# EAGLE board gatormicrophone (EAGLE 9.0.1), part 1 of 2
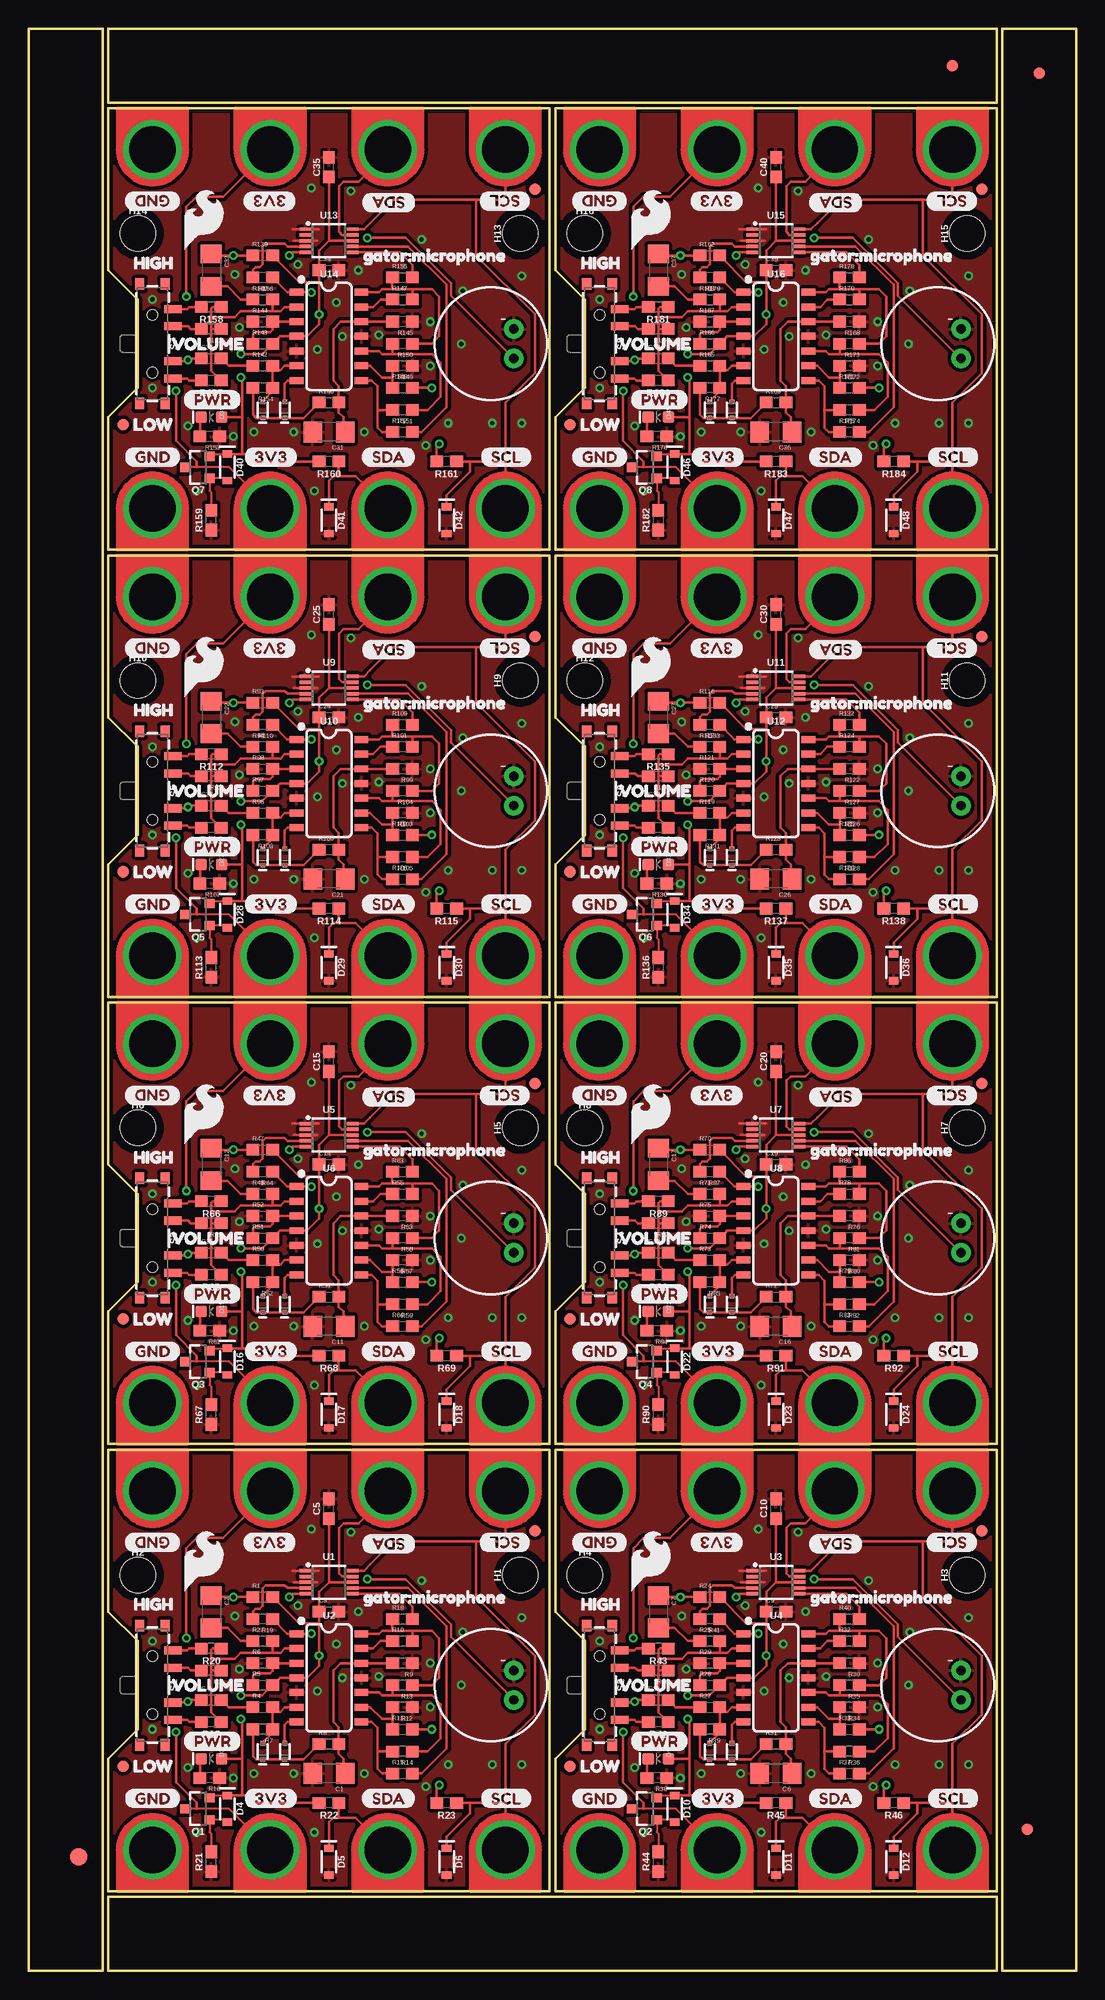
[diagram p0: board, top side]
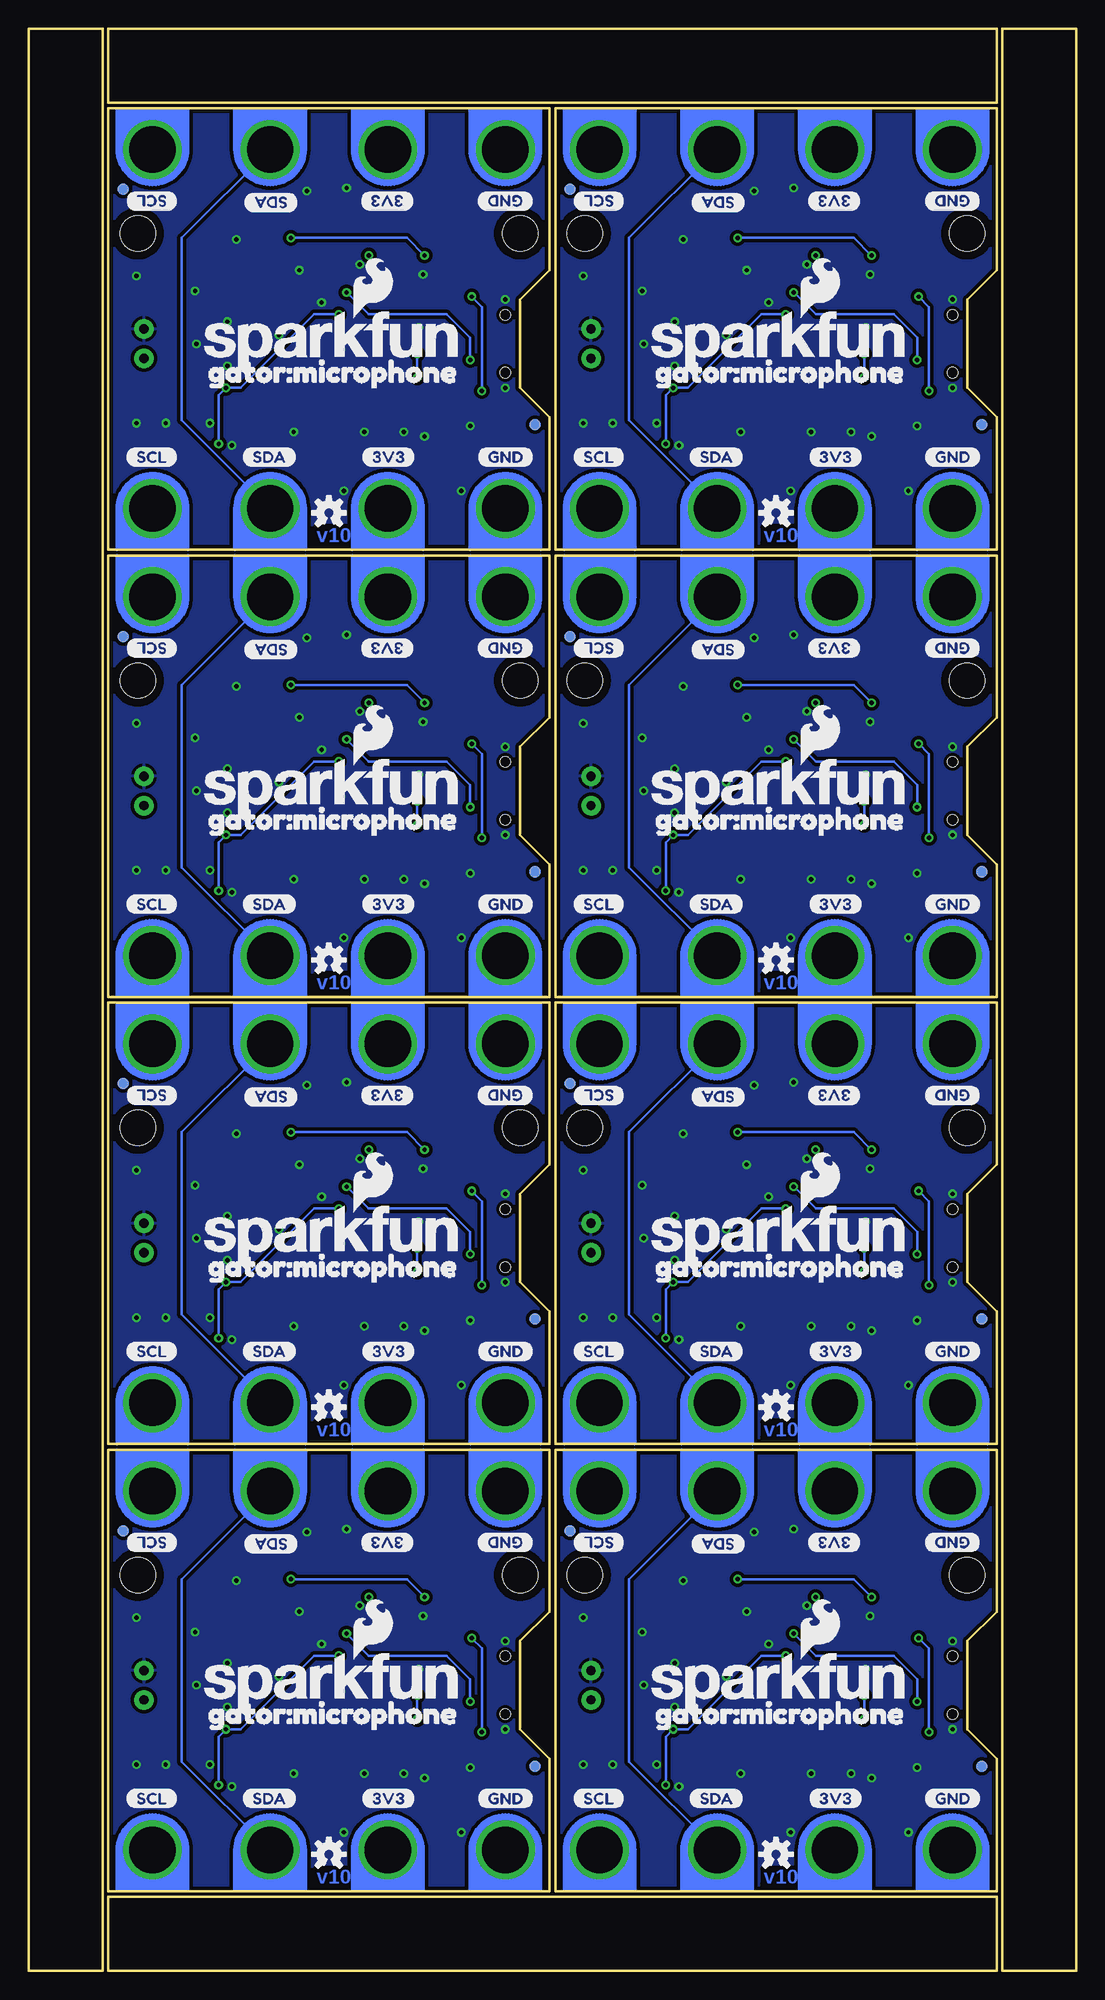
[diagram p1: board, bottom side, seen from below]

Size 90.42 x 167.64 mm. Coordinates in mm from the lower left corner, seen from the top.
Outline: 79.25,0 6.86,0 6.86,6.35 29.72,6.35
Outline: 27.18,6.35 83.57,6.35 83.57,0 76.71,0
Outline: 6.35,72.39 6.35,0 0,0 0,22.86
Outline: 0,20.32 0,167.64 6.35,167.64 6.35,69.85
Outline: 11.18,167.64 83.57,167.64 83.57,161.29 60.71,161.29
Outline: 63.25,161.29 6.86,161.29 6.86,167.64 13.72,167.64
Outline: 84.07,95.25 84.07,167.64 90.42,167.64 90.42,144.78
Outline: 90.42,147.32 90.42,0 84.07,0 84.07,97.79
Outline: 6.86,6.86 44.96,6.86 44.96,44.96 6.86,44.96 6.86,30.99 9.4,28.45 9.4,20.83 6.86,18.29 6.86,6.86
Outline: 45.47,6.86 83.57,6.86 83.57,44.96 45.47,44.96 45.47,30.99 48.01,28.45 48.01,20.83 45.47,18.29 45.47,6.86
Outline: 6.86,45.47 44.96,45.47 44.96,83.57 6.86,83.57 6.86,69.6 9.4,67.06 9.4,59.44 6.86,56.9 6.86,45.47
Outline: 45.47,45.47 83.57,45.47 83.57,83.57 45.47,83.57 45.47,69.6 48.01,67.06 48.01,59.44 45.47,56.9 45.47,45.47
Outline: 6.86,84.07 44.96,84.07 44.96,122.17 6.86,122.17 6.86,108.2 9.4,105.66 9.4,98.04 6.86,95.5 6.86,84.07
Outline: 45.47,84.07 83.57,84.07 83.57,122.17 45.47,122.17 45.47,108.2 48.01,105.66 48.01,98.04 45.47,95.5 45.47,84.07
Outline: 6.86,122.68 44.96,122.68 44.96,160.78 6.86,160.78 6.86,146.81 9.4,144.27 9.4,136.65 6.86,134.11 6.86,122.68
Outline: 45.47,122.68 83.57,122.68 83.57,160.78 45.47,160.78 45.47,146.81 48.01,144.27 48.01,136.65 45.47,134.11 45.47,122.68
Copper layers (1*16): Top 0.035mm / dielectric 1.5mm / Bottom 0.035mm
Design rules "SparkFun-2-layer-TIGHT": minimum track width 7mil, minimum drill 15mil, track to track 7mil, track to pad 7mil, pad to pad 7mil, via to via 7mil, smd to smd 7mil, copper to edge 7mil, drill to drill 7mil, minimum pad ring 7mil, minimum via ring 7mil, stop-mask expansion 4mil, vias tented up to drill 25mil, thermal gap 10mil

## Footprints (pad centres in the part's own frame; a part is rotated, then mirrored left to right if it is on the bottom)
1206@1 = smd 1.6 x 1.8: 1 -1.4,0; 2 1.4,0
0603 = smd 1.1 x 1: 1 -0.85,0; 2 0.85,0
SOD-523 = smd 0.4 x 0.4: A -0.7,0; C 0.7,0
LED-0603 = smd 1 x 1: A -0.877,0; C 0.877,0
SOD-323 = smd 0.63 x 0.83: A 1.15,0; C -1.15,0
FIDUCIAL-1.5X3 = smd 1.5 x 1.5: 1 0,0
FIDUCIAL-1X2 = smd 1 x 1: 1 0,0
STAND-OFF-TIGHT = hole 3.048: 0,0
GATOR_MINI = drill 4 pad 5.08: P$2 0,-0.254
MIC-9.7MM = drill 0.8 pad 1.676: 1 -2,1.27; 2 -2,-1.27
SOT23-3 = smd 0.8 x 0.9: 1 -0.95,-1; 2 0.95,-1; 3 0,1.1
SWITCH_SP3T_SMD = smd 0.7 x 1.5: 1 3,-1.75; 2 1.5,-1.75; 3 -1.5,-1.75; 4 -3,-1.75 | smd 1 x 0.8: P$1 -5.15,-1.1; P$2 -5.15,1.1; P$3 5.15,1.1; P$4 5.15,-1.1 | hole 0.9: 2.5,0; -2.5,0
PAD.03X.03 = smd 0.762 x 0.762: P$1 0,0
MSOP10 = smd 0.3 x 1: 1 -1,-2.05; 2 -0.5,-2.05; 3 0,-2.05; 4 0.5,-2.05; 5 1,-2.05; 6 1,2.05; 7 0.5,2.05; 8 0,2.05; 9 -0.5,2.05; 10 -1,2.05
SO14 = smd 0.6 x 1.2: 1 -3.175,-2.8; 2 -1.905,-2.8; 3 -0.635,-2.8; 4 0.635,-2.8; 5 1.905,-2.8; 6 3.175,-2.8; 7 4.445,-2.8; 8 4.445,2.8; 9 3.175,2.8; 10 1.905,2.8; 11 0.635,2.8; 12 -0.635,2.8; 13 -1.905,2.8; 14 -3.175,2.8

## Placement (x,y rotation side)
C1  10uF  [1206@1]  25.91,17.02 180 top
C2  10uF  [1206@1]  15.75,30.99 270 top
C3  1.0uF  [0603]  25.91,30.99 0 top
C4  1.0uF  [0603]  15.75,23.37 0 top
C5  0.1uF  [0603]  25.91,39.88 90 top
C6  10uF  [1206@1]  64.52,17.02 180 top
C7  10uF  [1206@1]  54.36,30.99 270 top
C8  1.0uF  [0603]  54.36,23.37 0 top
C9  1.0uF  [0603]  64.52,30.99 0 top
C10  0.1uF  [0603]  64.52,39.88 90 top
C11  10uF  [1206@1]  25.91,55.63 180 top
C12  10uF  [1206@1]  15.75,69.6 270 top
C13  1.0uF  [0603]  15.75,61.98 0 top
C14  1.0uF  [0603]  25.91,69.6 0 top
C15  0.1uF  [0603]  25.91,78.49 90 top
C16  10uF  [1206@1]  64.52,55.63 180 top
C17  10uF  [1206@1]  54.36,69.6 270 top
C18  1.0uF  [0603]  54.36,61.98 0 top
C19  1.0uF  [0603]  64.52,69.6 0 top
C20  0.1uF  [0603]  64.52,78.49 90 top
C21  10uF  [1206@1]  25.91,94.23 180 top
C22  10uF  [1206@1]  15.75,108.2 270 top
C23  1.0uF  [0603]  15.75,100.58 0 top
C24  1.0uF  [0603]  25.91,108.2 0 top
C25  0.1uF  [0603]  25.91,117.09 90 top
C26  10uF  [1206@1]  64.52,94.23 180 top
C27  10uF  [1206@1]  54.36,108.2 270 top
C28  1.0uF  [0603]  54.36,100.58 0 top
C29  1.0uF  [0603]  64.52,108.2 0 top
C30  0.1uF  [0603]  64.52,117.09 90 top
C31  10uF  [1206@1]  25.91,132.84 180 top
C32  10uF  [1206@1]  15.75,146.81 270 top
C33  1.0uF  [0603]  15.75,139.19 0 top
C34  1.0uF  [0603]  25.91,146.81 0 top
C35  0.1uF  [0603]  25.91,155.7 90 top
C36  10uF  [1206@1]  64.52,132.84 180 top
C37  10uF  [1206@1]  54.36,146.81 270 top
C38  1.0uF  [0603]  54.36,139.19 0 top
C39  1.0uF  [0603]  64.52,146.81 0 top
C40  0.1uF  [0603]  64.52,155.7 90 top
D1  120mA/40V/370mV  [SOD-523]  20.19,18.92 270 top
D2  120mA/40V/370mV  [SOD-523]  22.1,18.92 270 top
D3  RED  [LED-0603]  15.75,18.29 180 top
D4  3.6V  [SOD-323]  17.14,13.97 270 top
D5  3.6V  [SOD-323]  25.91,9.4 270 top
D6  3.6V  [SOD-323]  36.07,9.4 270 top
D7  120mA/40V/370mV  [SOD-523]  58.8,18.92 270 top
D8  120mA/40V/370mV  [SOD-523]  60.71,18.92 270 top
D9  RED  [LED-0603]  54.36,18.29 180 top
D10  3.6V  [SOD-323]  55.75,13.97 270 top
D11  3.6V  [SOD-323]  64.52,9.4 270 top
D12  3.6V  [SOD-323]  74.68,9.4 270 top
D13  120mA/40V/370mV  [SOD-523]  20.19,57.53 270 top
D14  120mA/40V/370mV  [SOD-523]  22.1,57.53 270 top
D15  RED  [LED-0603]  15.75,56.9 180 top
D16  3.6V  [SOD-323]  17.14,52.58 270 top
D17  3.6V  [SOD-323]  25.91,48.01 270 top
D18  3.6V  [SOD-323]  36.07,48.01 270 top
D19  120mA/40V/370mV  [SOD-523]  58.8,57.53 270 top
D20  120mA/40V/370mV  [SOD-523]  60.71,57.53 270 top
D21  RED  [LED-0603]  54.36,56.9 180 top
D22  3.6V  [SOD-323]  55.75,52.58 270 top
D23  3.6V  [SOD-323]  64.52,48.01 270 top
D24  3.6V  [SOD-323]  74.68,48.01 270 top
D25  120mA/40V/370mV  [SOD-523]  20.19,96.14 270 top
D26  120mA/40V/370mV  [SOD-523]  22.1,96.14 270 top
D27  RED  [LED-0603]  15.75,95.5 180 top
D28  3.6V  [SOD-323]  17.14,91.19 270 top
D29  3.6V  [SOD-323]  25.91,86.61 270 top
D30  3.6V  [SOD-323]  36.07,86.61 270 top
D31  120mA/40V/370mV  [SOD-523]  58.8,96.14 270 top
D32  120mA/40V/370mV  [SOD-523]  60.71,96.14 270 top
D33  RED  [LED-0603]  54.36,95.5 180 top
D34  3.6V  [SOD-323]  55.75,91.19 270 top
D35  3.6V  [SOD-323]  64.52,86.61 270 top
D36  3.6V  [SOD-323]  74.68,86.61 270 top
D37  120mA/40V/370mV  [SOD-523]  20.19,134.75 270 top
D38  120mA/40V/370mV  [SOD-523]  22.1,134.75 270 top
D39  RED  [LED-0603]  15.75,134.11 180 top
D40  3.6V  [SOD-323]  17.14,129.79 270 top
D41  3.6V  [SOD-323]  25.91,125.22 270 top
D42  3.6V  [SOD-323]  36.07,125.22 270 top
D43  120mA/40V/370mV  [SOD-523]  58.8,134.75 270 top
D44  120mA/40V/370mV  [SOD-523]  60.71,134.75 270 top
D45  RED  [LED-0603]  54.36,134.11 180 top
D46  3.6V  [SOD-323]  55.75,129.79 270 top
D47  3.6V  [SOD-323]  64.52,125.22 270 top
D48  3.6V  [SOD-323]  74.68,125.22 270 top
E$3  [FIDUCIAL-1.5X3]  4.32,9.84 0 top
E$5  [FIDUCIAL-1X2]  79.76,164.47 90 top
E$7  [FIDUCIAL-1X2]  87.25,163.83 180 top
E$8  [FIDUCIAL-1X2]  86.23,12.19 0 top
FID1  FIDUCIAL1X2  [FIDUCIAL-1X2]  8.13,17.65 0 bottom
FID2  FIDUCIAL1X2  [FIDUCIAL-1X2]  43.69,37.97 0 bottom
FID3  FIDUCIAL1X2  [FIDUCIAL-1X2]  8.13,17.65 0 top
FID4  FIDUCIAL1X2  [FIDUCIAL-1X2]  43.69,37.97 0 top
FID5  FIDUCIAL1X2  [FIDUCIAL-1X2]  46.74,17.65 0 top
FID6  FIDUCIAL1X2  [FIDUCIAL-1X2]  82.3,37.97 0 top
FID7  FIDUCIAL1X2  [FIDUCIAL-1X2]  46.74,17.65 0 bottom
FID8  FIDUCIAL1X2  [FIDUCIAL-1X2]  82.3,37.97 0 bottom
FID9  FIDUCIAL1X2  [FIDUCIAL-1X2]  8.13,56.26 0 top
FID10  FIDUCIAL1X2  [FIDUCIAL-1X2]  43.69,76.58 0 top
FID11  FIDUCIAL1X2  [FIDUCIAL-1X2]  8.13,56.26 0 bottom
FID12  FIDUCIAL1X2  [FIDUCIAL-1X2]  43.69,76.58 0 bottom
FID13  FIDUCIAL1X2  [FIDUCIAL-1X2]  46.74,56.26 0 top
FID14  FIDUCIAL1X2  [FIDUCIAL-1X2]  82.3,76.58 0 top
FID15  FIDUCIAL1X2  [FIDUCIAL-1X2]  46.74,56.26 0 bottom
FID16  FIDUCIAL1X2  [FIDUCIAL-1X2]  82.3,76.58 0 bottom
FID17  FIDUCIAL1X2  [FIDUCIAL-1X2]  8.13,94.87 0 top
FID18  FIDUCIAL1X2  [FIDUCIAL-1X2]  43.69,115.19 0 top
FID19  FIDUCIAL1X2  [FIDUCIAL-1X2]  8.13,94.87 0 bottom
FID20  FIDUCIAL1X2  [FIDUCIAL-1X2]  43.69,115.19 0 bottom
FID21  FIDUCIAL1X2  [FIDUCIAL-1X2]  46.74,94.87 0 top
FID22  FIDUCIAL1X2  [FIDUCIAL-1X2]  82.3,115.19 0 top
FID23  FIDUCIAL1X2  [FIDUCIAL-1X2]  46.74,94.87 0 bottom
FID24  FIDUCIAL1X2  [FIDUCIAL-1X2]  82.3,115.19 0 bottom
FID25  FIDUCIAL1X2  [FIDUCIAL-1X2]  8.13,133.48 0 top
FID26  FIDUCIAL1X2  [FIDUCIAL-1X2]  43.69,153.8 0 top
FID27  FIDUCIAL1X2  [FIDUCIAL-1X2]  8.13,133.48 0 bottom
FID28  FIDUCIAL1X2  [FIDUCIAL-1X2]  43.69,153.8 0 bottom
FID29  FIDUCIAL1X2  [FIDUCIAL-1X2]  46.74,133.48 0 top
FID30  FIDUCIAL1X2  [FIDUCIAL-1X2]  82.3,153.8 0 top
FID31  FIDUCIAL1X2  [FIDUCIAL-1X2]  46.74,133.48 0 bottom
FID32  FIDUCIAL1X2  [FIDUCIAL-1X2]  82.3,153.8 0 bottom
FRAME1  FRAME-LETTER  [CREATIVE_COMMONS]  8.13,-3.3 0 top  (outside the outline)
FRAME2  FRAME-LETTER  [CREATIVE_COMMONS]  46.74,-3.3 0 top  (outside the outline)
H1  STAND-OFFTIGHT  [STAND-OFF-TIGHT]  42.42,34.16 90 top
H2  STAND-OFFTIGHT  [STAND-OFF-TIGHT]  9.4,34.16 0 top
H3  STAND-OFFTIGHT  [STAND-OFF-TIGHT]  81.03,34.16 90 top
H4  STAND-OFFTIGHT  [STAND-OFF-TIGHT]  48.01,34.16 0 top
H5  STAND-OFFTIGHT  [STAND-OFF-TIGHT]  42.42,72.77 90 top
H6  STAND-OFFTIGHT  [STAND-OFF-TIGHT]  9.4,72.77 0 top
H7  STAND-OFFTIGHT  [STAND-OFF-TIGHT]  81.03,72.77 90 top
H8  STAND-OFFTIGHT  [STAND-OFF-TIGHT]  48.01,72.77 0 top
H9  STAND-OFFTIGHT  [STAND-OFF-TIGHT]  42.42,111.38 90 top
H10  STAND-OFFTIGHT  [STAND-OFF-TIGHT]  9.4,111.38 0 top
H11  STAND-OFFTIGHT  [STAND-OFF-TIGHT]  81.03,111.38 90 top
H12  STAND-OFFTIGHT  [STAND-OFF-TIGHT]  48.01,111.38 0 top
H13  STAND-OFFTIGHT  [STAND-OFF-TIGHT]  42.42,149.99 90 top
H14  STAND-OFFTIGHT  [STAND-OFF-TIGHT]  9.4,149.99 0 top
H15  STAND-OFFTIGHT  [STAND-OFF-TIGHT]  81.03,149.99 90 top
H16  STAND-OFFTIGHT  [STAND-OFF-TIGHT]  48.01,149.99 0 top
J1  GATORGATOR_MINI  [GATOR_MINI]  10.67,41.15 180 top
J2  GATORGATOR_MINI  [GATOR_MINI]  41.15,10.67 0 top
J3  GATORGATOR_MINI  [GATOR_MINI]  30.99,10.67 0 top
J4  GATORGATOR_MINI  [GATOR_MINI]  20.83,10.67 0 top
J5  GATORGATOR_MINI  [GATOR_MINI]  10.67,10.67 0 top
J6  GATORGATOR_MINI  [GATOR_MINI]  30.99,41.15 180 top
J7  GATORGATOR_MINI  [GATOR_MINI]  41.15,41.15 180 top
J8  GATORGATOR_MINI  [GATOR_MINI]  20.83,41.15 180 top
J9  GATORGATOR_MINI  [GATOR_MINI]  79.76,10.67 0 top
J10  GATORGATOR_MINI  [GATOR_MINI]  69.6,10.67 0 top
J11  GATORGATOR_MINI  [GATOR_MINI]  59.44,10.67 0 top
J12  GATORGATOR_MINI  [GATOR_MINI]  49.28,10.67 0 top
J13  GATORGATOR_MINI  [GATOR_MINI]  49.28,41.15 180 top
J14  GATORGATOR_MINI  [GATOR_MINI]  69.6,41.15 180 top
J15  GATORGATOR_MINI  [GATOR_MINI]  79.76,41.15 180 top
J16  GATORGATOR_MINI  [GATOR_MINI]  59.44,41.15 180 top
J17  GATORGATOR_MINI  [GATOR_MINI]  41.15,49.28 0 top
J18  GATORGATOR_MINI  [GATOR_MINI]  30.99,49.28 0 top
J19  GATORGATOR_MINI  [GATOR_MINI]  20.83,49.28 0 top
J20  GATORGATOR_MINI  [GATOR_MINI]  10.67,49.28 0 top
J21  GATORGATOR_MINI  [GATOR_MINI]  10.67,79.76 180 top
J22  GATORGATOR_MINI  [GATOR_MINI]  30.99,79.76 180 top
J23  GATORGATOR_MINI  [GATOR_MINI]  41.15,79.76 180 top
J24  GATORGATOR_MINI  [GATOR_MINI]  20.83,79.76 180 top
J25  GATORGATOR_MINI  [GATOR_MINI]  79.76,49.28 0 top
J26  GATORGATOR_MINI  [GATOR_MINI]  69.6,49.28 0 top
J27  GATORGATOR_MINI  [GATOR_MINI]  59.44,49.28 0 top
J28  GATORGATOR_MINI  [GATOR_MINI]  49.28,49.28 0 top
J29  GATORGATOR_MINI  [GATOR_MINI]  49.28,79.76 180 top
J30  GATORGATOR_MINI  [GATOR_MINI]  69.6,79.76 180 top
J31  GATORGATOR_MINI  [GATOR_MINI]  79.76,79.76 180 top
J32  GATORGATOR_MINI  [GATOR_MINI]  59.44,79.76 180 top
J33  GATORGATOR_MINI  [GATOR_MINI]  41.15,87.88 0 top
J34  GATORGATOR_MINI  [GATOR_MINI]  30.99,87.88 0 top
J35  GATORGATOR_MINI  [GATOR_MINI]  20.83,87.88 0 top
J36  GATORGATOR_MINI  [GATOR_MINI]  10.67,87.88 0 top
J37  GATORGATOR_MINI  [GATOR_MINI]  10.67,118.36 180 top
J38  GATORGATOR_MINI  [GATOR_MINI]  30.99,118.36 180 top
J39  GATORGATOR_MINI  [GATOR_MINI]  41.15,118.36 180 top
J40  GATORGATOR_MINI  [GATOR_MINI]  20.83,118.36 180 top
J41  GATORGATOR_MINI  [GATOR_MINI]  79.76,87.88 0 top
J42  GATORGATOR_MINI  [GATOR_MINI]  69.6,87.88 0 top
J43  GATORGATOR_MINI  [GATOR_MINI]  59.44,87.88 0 top
J44  GATORGATOR_MINI  [GATOR_MINI]  49.28,87.88 0 top
J45  GATORGATOR_MINI  [GATOR_MINI]  49.28,118.36 180 top
J46  GATORGATOR_MINI  [GATOR_MINI]  69.6,118.36 180 top
J47  GATORGATOR_MINI  [GATOR_MINI]  79.76,118.36 180 top
J48  GATORGATOR_MINI  [GATOR_MINI]  59.44,118.36 180 top
J49  GATORGATOR_MINI  [GATOR_MINI]  41.15,126.49 0 top
J50  GATORGATOR_MINI  [GATOR_MINI]  30.99,126.49 0 top
J51  GATORGATOR_MINI  [GATOR_MINI]  20.83,126.49 0 top
J52  GATORGATOR_MINI  [GATOR_MINI]  10.67,126.49 0 top
J53  GATORGATOR_MINI  [GATOR_MINI]  10.67,156.97 180 top
J54  GATORGATOR_MINI  [GATOR_MINI]  30.99,156.97 180 top
J55  GATORGATOR_MINI  [GATOR_MINI]  41.15,156.97 180 top
J56  GATORGATOR_MINI  [GATOR_MINI]  20.83,156.97 180 top
J57  GATORGATOR_MINI  [GATOR_MINI]  79.76,126.49 0 top
J58  GATORGATOR_MINI  [GATOR_MINI]  69.6,126.49 0 top
J59  GATORGATOR_MINI  [GATOR_MINI]  59.44,126.49 0 top
J60  GATORGATOR_MINI  [GATOR_MINI]  49.28,126.49 0 top
J61  GATORGATOR_MINI  [GATOR_MINI]  49.28,156.97 180 top
J62  GATORGATOR_MINI  [GATOR_MINI]  69.6,156.97 180 top
J63  GATORGATOR_MINI  [GATOR_MINI]  79.76,156.97 180 top
J64  GATORGATOR_MINI  [GATOR_MINI]  59.44,156.97 180 top
LOGO1  OSHW-LOGOS  [OSHW-LOGO-S]  25.91,10.03 0 bottom
LOGO2  SFE_LOGO_NAME_FLAME.2_INCH  [SFE_LOGO_NAME_FLAME_.2]  25.65,24.64 0 bottom
LOGO3  SFE_LOGO_FLAME.2_INCH  [SFE_LOGO_FLAME_.2]  15.11,35.31 0 top
LOGO4  OSHW-LOGOS  [OSHW-LOGO-S]  64.52,10.03 0 bottom
LOGO5  SFE_LOGO_NAME_FLAME.2_INCH  [SFE_LOGO_NAME_FLAME_.2]  64.26,24.64 0 bottom
LOGO6  SFE_LOGO_FLAME.2_INCH  [SFE_LOGO_FLAME_.2]  53.72,35.31 0 top
LOGO7  OSHW-LOGOS  [OSHW-LOGO-S]  25.91,48.64 0 bottom
LOGO8  SFE_LOGO_NAME_FLAME.2_INCH  [SFE_LOGO_NAME_FLAME_.2]  25.65,63.25 0 bottom
LOGO9  SFE_LOGO_FLAME.2_INCH  [SFE_LOGO_FLAME_.2]  15.11,73.91 0 top
LOGO10  OSHW-LOGOS  [OSHW-LOGO-S]  64.52,48.64 0 bottom
LOGO11  SFE_LOGO_NAME_FLAME.2_INCH  [SFE_LOGO_NAME_FLAME_.2]  64.26,63.25 0 bottom
LOGO12  SFE_LOGO_FLAME.2_INCH  [SFE_LOGO_FLAME_.2]  53.72,73.91 0 top
LOGO13  OSHW-LOGOS  [OSHW-LOGO-S]  25.91,87.25 0 bottom
LOGO14  SFE_LOGO_NAME_FLAME.2_INCH  [SFE_LOGO_NAME_FLAME_.2]  25.65,101.85 0 bottom
LOGO15  SFE_LOGO_FLAME.2_INCH  [SFE_LOGO_FLAME_.2]  15.11,112.52 0 top
LOGO16  OSHW-LOGOS  [OSHW-LOGO-S]  64.52,87.25 0 bottom
LOGO17  SFE_LOGO_NAME_FLAME.2_INCH  [SFE_LOGO_NAME_FLAME_.2]  64.26,101.85 0 bottom
LOGO18  SFE_LOGO_FLAME.2_INCH  [SFE_LOGO_FLAME_.2]  53.72,112.52 0 top
LOGO19  OSHW-LOGOS  [OSHW-LOGO-S]  25.91,125.86 0 bottom
LOGO20  SFE_LOGO_NAME_FLAME.2_INCH  [SFE_LOGO_NAME_FLAME_.2]  25.65,140.46 0 bottom
LOGO21  SFE_LOGO_FLAME.2_INCH  [SFE_LOGO_FLAME_.2]  15.11,151.13 0 top
LOGO22  OSHW-LOGOS  [OSHW-LOGO-S]  64.52,125.86 0 bottom
LOGO23  SFE_LOGO_NAME_FLAME.2_INCH  [SFE_LOGO_NAME_FLAME_.2]  64.26,140.46 0 bottom
LOGO24  SFE_LOGO_FLAME.2_INCH  [SFE_LOGO_FLAME_.2]  53.72,151.13 0 top
MIC1  MIC9.7MM  [MIC-9.7MM]  39.88,24.64 180 top
MIC2  MIC9.7MM  [MIC-9.7MM]  78.49,24.64 180 top
MIC3  MIC9.7MM  [MIC-9.7MM]  39.88,63.25 180 top
MIC4  MIC9.7MM  [MIC-9.7MM]  78.49,63.25 180 top
MIC5  MIC9.7MM  [MIC-9.7MM]  39.88,101.85 180 top
MIC6  MIC9.7MM  [MIC-9.7MM]  78.49,101.85 180 top
MIC7  MIC9.7MM  [MIC-9.7MM]  39.88,140.46 180 top
MIC8  MIC9.7MM  [MIC-9.7MM]  78.49,140.46 180 top
Q1  2.5A/30V/105mΩ  [SOT23-3]  14.61,13.97 90 top
Q2  2.5A/30V/105mΩ  [SOT23-3]  53.21,13.97 90 top
Q3  2.5A/30V/105mΩ  [SOT23-3]  14.61,52.58 90 top
Q4  2.5A/30V/105mΩ  [SOT23-3]  53.21,52.58 90 top
Q5  2.5A/30V/105mΩ  [SOT23-3]  14.61,91.19 90 top
Q6  2.5A/30V/105mΩ  [SOT23-3]  53.21,91.19 90 top
Q7  2.5A/30V/105mΩ  [SOT23-3]  14.61,129.79 90 top
Q8  2.5A/30V/105mΩ  [SOT23-3]  53.21,129.79 90 top
R1  2.2k  [0603]  20.19,32.26 0 top
R2  1k  [0603]  20.19,28.45 0 top
R3  100k  [0603]  15.75,25.91 180 top
R4  10k  [0603]  20.19,22.73 0 top
R5  10k  [0603]  20.19,24.64 0 top
R6  10k  [0603]  20.19,26.54 0 top
R7  22k  [0603]  20.19,20.83 180 top
R8  100  [0603]  25.91,19.56 0 top
R9  10k  [0603]  32.26,26.54 180 top
R10  1k  [0603]  32.26,28.45 0 top
R11  100k  [0603]  32.26,20.83 0 top
R12  3.3k  [0603]  32.26,22.73 180 top
R13  1k  [0603]  32.26,24.64 180 top
R14  100k  [0603]  32.26,18.92 180 top
R15  100  [0603]  32.26,17.02 0 top
R16  1k  [0603]  15.62,16.64 180 top
R17  10k  [0603]  15.75,21.46 180 top
R18  100  [0603]  32.26,30.35 0 top
R19  100  [0603]  20.19,30.35 180 top
R20  1M  [0603]  15.75,27.81 180 top
R21  10k  [0603]  15.75,9.4 90 top
R22  10k  [0603]  25.91,14.48 180 top
R23  10k  [0603]  36.07,14.48 180 top
R24  2.2k  [0603]  58.8,32.26 0 top
R25  1k  [0603]  58.8,28.45 0 top
R26  100k  [0603]  54.36,25.91 180 top
R27  10k  [0603]  58.8,22.73 0 top
R28  10k  [0603]  58.8,24.64 0 top
R29  10k  [0603]  58.8,26.54 0 top
R30  10k  [0603]  70.87,26.54 180 top
R31  100  [0603]  64.52,19.56 0 top
R32  1k  [0603]  70.87,28.45 0 top
R33  100k  [0603]  70.87,20.83 0 top
R34  3.3k  [0603]  70.87,22.73 180 top
R35  1k  [0603]  70.87,24.64 180 top
R36  100k  [0603]  70.87,18.92 180 top
R37  100  [0603]  70.87,17.02 0 top
R38  1k  [0603]  54.23,16.64 180 top
R39  22k  [0603]  58.8,20.83 180 top
R40  100  [0603]  70.87,30.35 0 top
R41  100  [0603]  58.8,30.35 180 top
R42  10k  [0603]  54.36,21.46 180 top
R43  1M  [0603]  54.36,27.81 180 top
R44  10k  [0603]  54.36,9.4 90 top
R45  10k  [0603]  64.52,14.48 180 top
R46  10k  [0603]  74.68,14.48 180 top
R47  2.2k  [0603]  20.19,70.87 0 top
R48  1k  [0603]  20.19,67.06 0 top
R49  100k  [0603]  15.75,64.52 180 top
R50  10k  [0603]  20.19,61.34 0 top
R51  10k  [0603]  20.19,63.25 0 top
R52  10k  [0603]  20.19,65.15 0 top
R53  10k  [0603]  32.26,65.15 180 top
R54  100  [0603]  25.91,58.17 0 top
R55  1k  [0603]  32.26,67.06 0 top
R56  100k  [0603]  32.26,59.44 0 top
R57  3.3k  [0603]  32.26,61.34 180 top
R58  1k  [0603]  32.26,63.25 180 top
R59  100k  [0603]  32.26,57.53 180 top
R60  100  [0603]  32.26,55.63 0 top
R61  1k  [0603]  15.62,55.24 180 top
R62  22k  [0603]  20.19,59.44 180 top
R63  100  [0603]  32.26,68.96 0 top
R64  100  [0603]  20.19,68.96 180 top
R65  10k  [0603]  15.75,60.07 180 top
R66  1M  [0603]  15.75,66.42 180 top
R67  10k  [0603]  15.75,48.01 90 top
R68  10k  [0603]  25.91,53.09 180 top
R69  10k  [0603]  36.07,53.09 180 top
R70  2.2k  [0603]  58.8,70.87 0 top
R71  1k  [0603]  58.8,67.06 0 top
R72  100k  [0603]  54.36,64.52 180 top
R73  10k  [0603]  58.8,61.34 0 top
R74  10k  [0603]  58.8,63.25 0 top
R75  10k  [0603]  58.8,65.15 0 top
R76  10k  [0603]  70.87,65.15 180 top
R77  100  [0603]  64.52,58.17 0 top
R78  1k  [0603]  70.87,67.06 0 top
R79  100k  [0603]  70.87,59.44 0 top
R80  3.3k  [0603]  70.87,61.34 180 top
R81  1k  [0603]  70.87,63.25 180 top
R82  100k  [0603]  70.87,57.53 180 top
R83  100  [0603]  70.87,55.63 0 top
R84  1k  [0603]  54.23,55.24 180 top
R85  22k  [0603]  58.8,59.44 180 top
R86  100  [0603]  70.87,68.96 0 top
R87  100  [0603]  58.8,68.96 180 top
R88  10k  [0603]  54.36,60.07 180 top
R89  1M  [0603]  54.36,66.42 180 top
R90  10k  [0603]  54.36,48.01 90 top
R91  10k  [0603]  64.52,53.09 180 top
R92  10k  [0603]  74.68,53.09 180 top
R93  2.2k  [0603]  20.19,109.47 0 top
R94  1k  [0603]  20.19,105.66 0 top
R95  100k  [0603]  15.75,103.12 180 top
R96  10k  [0603]  20.19,99.95 0 top
R97  10k  [0603]  20.19,101.85 0 top
R98  10k  [0603]  20.19,103.76 0 top
R99  10k  [0603]  32.26,103.76 180 top
R100  100  [0603]  25.91,96.77 0 top
R101  1k  [0603]  32.26,105.66 0 top
R102  100k  [0603]  32.26,98.04 0 top
R103  3.3k  [0603]  32.26,99.95 180 top
R104  1k  [0603]  32.26,101.85 180 top
R105  100k  [0603]  32.26,96.14 180 top
R106  100  [0603]  32.26,94.23 0 top
R107  1k  [0603]  15.62,93.85 180 top
R108  22k  [0603]  20.19,98.04 180 top
R109  100  [0603]  32.26,107.57 0 top
R110  100  [0603]  20.19,107.57 180 top
R111  10k  [0603]  15.75,98.68 180 top
R112  1M  [0603]  15.75,105.03 180 top
R113  10k  [0603]  15.75,86.61 90 top
R114  10k  [0603]  25.91,91.69 180 top
R115  10k  [0603]  36.07,91.69 180 top
R116  2.2k  [0603]  58.8,109.47 0 top
R117  1k  [0603]  58.8,105.66 0 top
R118  100k  [0603]  54.36,103.12 180 top
R119  10k  [0603]  58.8,99.95 0 top
R120  10k  [0603]  58.8,101.85 0 top
R121  10k  [0603]  58.8,103.76 0 top
R122  10k  [0603]  70.87,103.76 180 top
R123  100  [0603]  64.52,96.77 0 top
R124  1k  [0603]  70.87,105.66 0 top
R125  100k  [0603]  70.87,98.04 0 top
R126  3.3k  [0603]  70.87,99.95 180 top
R127  1k  [0603]  70.87,101.85 180 top
R128  100k  [0603]  70.87,96.14 180 top
R129  100  [0603]  70.87,94.23 0 top
R130  1k  [0603]  54.23,93.85 180 top
R131  22k  [0603]  58.8,98.04 180 top
R132  100  [0603]  70.87,107.57 0 top
R133  100  [0603]  58.8,107.57 180 top
R134  10k  [0603]  54.36,98.68 180 top
R135  1M  [0603]  54.36,105.03 180 top
R136  10k  [0603]  54.36,86.61 90 top
R137  10k  [0603]  64.52,91.69 180 top
R138  10k  [0603]  74.68,91.69 180 top
R139  2.2k  [0603]  20.19,148.08 0 top
R140  1k  [0603]  20.19,144.27 0 top
R141  100k  [0603]  15.75,141.73 180 top
R142  10k  [0603]  20.19,138.56 0 top
R143  10k  [0603]  20.19,140.46 0 top
R144  10k  [0603]  20.19,142.37 0 top
R145  10k  [0603]  32.26,142.37 180 top
R146  100  [0603]  25.91,135.38 0 top
R147  1k  [0603]  32.26,144.27 0 top
R148  100k  [0603]  32.26,136.65 0 top
R149  3.3k  [0603]  32.26,138.56 180 top
R150  1k  [0603]  32.26,140.46 180 top
R151  100k  [0603]  32.26,134.75 180 top
R152  100  [0603]  32.26,132.84 0 top
R153  1k  [0603]  15.62,132.46 180 top
R154  22k  [0603]  20.19,136.65 180 top
R155  100  [0603]  32.26,146.18 0 top
R156  100  [0603]  20.19,146.18 180 top
R157  10k  [0603]  15.75,137.29 180 top
R158  1M  [0603]  15.75,143.64 180 top
R159  10k  [0603]  15.75,125.22 90 top
R160  10k  [0603]  25.91,130.3 180 top
R161  10k  [0603]  36.07,130.3 180 top
R162  2.2k  [0603]  58.8,148.08 0 top
R163  1k  [0603]  58.8,144.27 0 top
R164  100k  [0603]  54.36,141.73 180 top
R165  10k  [0603]  58.8,138.56 0 top
R166  10k  [0603]  58.8,140.46 0 top
R167  10k  [0603]  58.8,142.37 0 top
R168  10k  [0603]  70.87,142.37 180 top
R169  100  [0603]  64.52,135.38 0 top
R170  1k  [0603]  70.87,144.27 0 top
R171  100k  [0603]  70.87,136.65 0 top
R172  3.3k  [0603]  70.87,138.56 180 top
R173  1k  [0603]  70.87,140.46 180 top
R174  100k  [0603]  70.87,134.75 180 top
R175  100  [0603]  70.87,132.84 0 top
R176  1k  [0603]  54.23,132.46 180 top
R177  22k  [0603]  58.8,136.65 180 top
R178  100  [0603]  70.87,146.18 0 top
R179  100  [0603]  58.8,146.18 180 top
R180  10k  [0603]  54.36,137.29 180 top
R181  1M  [0603]  54.36,143.64 180 top
R182  10k  [0603]  54.36,125.22 90 top
R183  10k  [0603]  64.52,130.3 180 top
R184  10k  [0603]  74.68,130.3 180 top
S1  [SWITCH_SP3T_SMD]  10.67,24.64 90 top
S2  [SWITCH_SP3T_SMD]  49.28,24.64 90 top
S3  [SWITCH_SP3T_SMD]  10.67,63.25 90 top
S4  [SWITCH_SP3T_SMD]  49.28,63.25 90 top
S5  [SWITCH_SP3T_SMD]  10.67,101.85 90 top
S6  [SWITCH_SP3T_SMD]  49.28,101.85 90 top
S7  [SWITCH_SP3T_SMD]  10.67,140.46 90 top
S8  [SWITCH_SP3T_SMD]  49.28,140.46 90 top
TP1  TEST-POINT3  [PAD.03X.03]  22.48,32.26 0 bottom
TP2  TEST-POINT3  [PAD.03X.03]  61.09,32.26 0 bottom
TP3  TEST-POINT3  [PAD.03X.03]  22.48,70.87 0 bottom
TP4  TEST-POINT3  [PAD.03X.03]  61.09,70.87 0 bottom
TP5  TEST-POINT3  [PAD.03X.03]  22.48,109.47 0 bottom
TP6  TEST-POINT3  [PAD.03X.03]  61.09,109.47 0 bottom
TP7  TEST-POINT3  [PAD.03X.03]  22.48,148.08 0 bottom
TP8  TEST-POINT3  [PAD.03X.03]  61.09,148.08 0 bottom
U1  ADS1015  [MSOP10]  25.91,33.53 270 top
U2  LMV324  [SO14]  25.91,25.91 270 top
U3  ADS1015  [MSOP10]  64.52,33.53 270 top
U4  LMV324  [SO14]  64.52,25.91 270 top
U5  ADS1015  [MSOP10]  25.91,72.14 270 top
U6  LMV324  [SO14]  25.91,64.52 270 top
U7  ADS1015  [MSOP10]  64.52,72.14 270 top
U8  LMV324  [SO14]  64.52,64.52 270 top
U9  ADS1015  [MSOP10]  25.91,110.74 270 top
U10  LMV324  [SO14]  25.91,103.12 270 top
U11  ADS1015  [MSOP10]  64.52,110.74 270 top
U12  LMV324  [SO14]  64.52,103.12 270 top
U13  ADS1015  [MSOP10]  25.91,149.35 270 top
U14  LMV324  [SO14]  25.91,141.73 270 top
U15  ADS1015  [MSOP10]  64.52,149.35 270 top
U16  LMV324  [SO14]  64.52,141.73 270 top
U$1  [3V31]  18.54,14.86 0 top
U$2  [SCL1]  38.99,14.86 0 top
U$3  [SDA2]  28.7,14.86 0 top
U$4  [PWR0]  13.34,19.81 0 top
U$5  [GND0]  8.25,14.86 0 top
U$6  [GND0]  13.08,14.86 0 bottom
U$7  [3V31]  23.11,14.86 0 bottom
U$8  [SDA2]  33.4,14.86 0 bottom
U$9  [SCL1]  43.43,14.86 0 bottom
U$10  [GND0]  13.08,36.96 180 top
U$11  [3V31]  23.11,36.96 180 top
U$12  [SDA2]  33.4,36.83 180 top
U$13  [SCL1]  43.31,36.96 180 top
U$14  [GATOR#MICROPHONE1]  27.94,32.26 0 top
U$15  [LOW1]  8.13,17.65 0 top
U$16  [VOLUME2]  11.43,24.64 0 top
U$17  [GND0]  8.25,36.96 180 bottom
U$18  [3V31]  18.54,36.96 180 bottom
U$19  [SDA2]  28.57,36.83 180 bottom
U$20  [SCL1]  38.99,36.96 180 bottom
U$21  [HIGH0]  8.13,31.62 0 top
U$22  [ORDERING_INSTRUCTIONS]  1.78,-8.38 0 top  (outside the outline)
U$23  [3V31]  57.15,14.86 0 top
U$24  [GATOR#MICROPHONE0]  37.97,22.23 0 bottom
U$25  [GND0]  46.86,14.86 0 top
U$26  [GND0]  51.69,14.86 0 bottom
U$27  [3V31]  61.72,14.86 0 bottom
U$28  [SCL1]  77.6,14.86 0 top
U$29  [SDA2]  67.31,14.86 0 top
U$30  [PWR0]  51.94,19.81 0 top
U$31  [SDA2]  72.01,14.86 0 bottom
U$32  [SCL1]  82.04,14.86 0 bottom
U$33  [GND0]  51.69,36.96 180 top
U$34  [3V31]  61.72,36.96 180 top
U$35  [SDA2]  72.01,36.83 180 top
U$36  [SCL1]  81.92,36.96 180 top
U$37  [LOW1]  46.74,17.65 0 top
U$38  [VOLUME2]  50.04,24.64 0 top
U$39  [GND0]  46.86,36.96 180 bottom
U$40  [3V31]  57.15,36.96 180 bottom
U$41  [SDA2]  67.18,36.83 180 bottom
U$42  [SCL1]  77.6,36.96 180 bottom
U$43  [HIGH0]  46.74,31.62 0 top
U$44  [GATOR#MICROPHONE0]  76.58,22.23 0 bottom
U$45  [GATOR#MICROPHONE1]  66.55,32.26 0 top
U$46  [3V31]  18.54,53.47 0 top
U$47  [GND0]  8.25,53.47 0 top
U$48  [GND0]  13.08,53.47 0 bottom
U$49  [3V31]  23.11,53.47 0 bottom
U$50  [SCL1]  38.99,53.47 0 top
U$51  [SDA2]  28.7,53.47 0 top
U$52  [PWR0]  13.34,58.42 0 top
U$53  [SDA2]  33.4,53.47 0 bottom
U$54  [SCL1]  43.43,53.47 0 bottom
U$55  [GND0]  13.08,75.56 180 top
U$56  [3V31]  23.11,75.56 180 top
U$57  [SDA2]  33.4,75.44 180 top
U$58  [SCL1]  43.31,75.56 180 top
U$59  [LOW1]  8.13,56.26 0 top
U$60  [VOLUME2]  11.43,63.25 0 top
U$61  [GND0]  8.25,75.56 180 bottom
U$62  [3V31]  18.54,75.56 180 bottom
U$63  [SDA2]  28.57,75.44 180 bottom
U$64  [SCL1]  38.99,75.56 180 bottom
U$65  [HIGH0]  8.13,70.23 0 top
U$66  [GATOR#MICROPHONE0]  37.97,60.83 0 bottom
U$67  [GATOR#MICROPHONE1]  27.94,70.87 0 top
U$68  [3V31]  57.15,53.47 0 top
U$69  [GND0]  46.86,53.47 0 top
U$70  [GND0]  51.69,53.47 0 bottom
U$71  [3V31]  61.72,53.47 0 bottom
U$72  [SCL1]  77.6,53.47 0 top
U$73  [SDA2]  67.31,53.47 0 top
U$74  [PWR0]  51.94,58.42 0 top
U$75  [SDA2]  72.01,53.47 0 bottom
U$76  [SCL1]  82.04,53.47 0 bottom
U$77  [GND0]  51.69,75.56 180 top
U$78  [3V31]  61.72,75.56 180 top
U$79  [SDA2]  72.01,75.44 180 top
U$80  [SCL1]  81.92,75.56 180 top
U$81  [LOW1]  46.74,56.26 0 top
U$82  [VOLUME2]  50.04,63.25 0 top
U$83  [GND0]  46.86,75.56 180 bottom
U$84  [3V31]  57.15,75.56 180 bottom
U$85  [SDA2]  67.18,75.44 180 bottom
U$86  [SCL1]  77.6,75.56 180 bottom
U$87  [HIGH0]  46.74,70.23 0 top
U$88  [GATOR#MICROPHONE0]  76.58,60.83 0 bottom
U$89  [GATOR#MICROPHONE1]  66.55,70.87 0 top
U$90  [3V31]  18.54,92.08 0 top
U$91  [GND0]  8.25,92.08 0 top
U$92  [GND0]  13.08,92.08 0 bottom
U$93  [3V31]  23.11,92.08 0 bottom
U$94  [SCL1]  38.99,92.08 0 top
U$95  [SDA2]  28.7,92.08 0 top
U$96  [PWR0]  13.34,97.03 0 top
U$97  [SDA2]  33.4,92.08 0 bottom
U$98  [SCL1]  43.43,92.08 0 bottom
U$99  [GND0]  13.08,114.17 180 top
U$100  [3V31]  23.11,114.17 180 top
U$101  [SDA2]  33.4,114.05 180 top
U$102  [SCL1]  43.31,114.17 180 top
U$103  [LOW1]  8.13,94.87 0 top
U$104  [VOLUME2]  11.43,101.85 0 top
U$105  [GND0]  8.25,114.17 180 bottom
U$106  [3V31]  18.54,114.17 180 bottom
U$107  [SDA2]  28.57,114.05 180 bottom
U$108  [SCL1]  38.99,114.17 180 bottom
U$109  [HIGH0]  8.13,108.84 0 top
U$110  [GATOR#MICROPHONE0]  37.97,99.44 0 bottom
U$111  [GATOR#MICROPHONE1]  27.94,109.47 0 top
U$112  [3V31]  57.15,92.08 0 top
U$113  [GND0]  46.86,92.08 0 top
U$114  [GND0]  51.69,92.08 0 bottom
U$115  [3V31]  61.72,92.08 0 bottom
U$116  [SCL1]  77.6,92.08 0 top
U$117  [SDA2]  67.31,92.08 0 top
U$118  [PWR0]  51.94,97.03 0 top
U$119  [SDA2]  72.01,92.08 0 bottom
U$120  [SCL1]  82.04,92.08 0 bottom
U$121  [GND0]  51.69,114.17 180 top
U$122  [3V31]  61.72,114.17 180 top
U$123  [SDA2]  72.01,114.05 180 top
U$124  [SCL1]  81.92,114.17 180 top
U$125  [LOW1]  46.74,94.87 0 top
U$126  [VOLUME2]  50.04,101.85 0 top
U$127  [GND0]  46.86,114.17 180 bottom
U$128  [3V31]  57.15,114.17 180 bottom
U$129  [SDA2]  67.18,114.05 180 bottom
U$130  [SCL1]  77.6,114.17 180 bottom
U$131  [HIGH0]  46.74,108.84 0 top
U$132  [GATOR#MICROPHONE0]  76.58,99.44 0 bottom
U$133  [GATOR#MICROPHONE1]  66.55,109.47 0 top
U$134  [3V31]  18.54,130.68 0 top
U$135  [GND0]  8.25,130.68 0 top
U$136  [GND0]  13.08,130.68 0 bottom
U$137  [3V31]  23.11,130.68 0 bottom
U$138  [SCL1]  38.99,130.68 0 top
U$139  [SDA2]  28.7,130.68 0 top
U$140  [PWR0]  13.34,135.64 0 top
U$141  [SDA2]  33.4,130.68 0 bottom
U$142  [SCL1]  43.43,130.68 0 bottom
U$143  [GND0]  13.08,152.78 180 top
U$144  [3V31]  23.11,152.78 180 top
U$145  [SDA2]  33.4,152.65 180 top
U$146  [SCL1]  43.31,152.78 180 top
U$147  [LOW1]  8.13,133.48 0 top
U$148  [VOLUME2]  11.43,140.46 0 top
U$149  [GND0]  8.25,152.78 180 bottom
U$150  [3V31]  18.54,152.78 180 bottom
U$151  [SDA2]  28.57,152.65 180 bottom
U$152  [SCL1]  38.99,152.78 180 bottom
U$153  [HIGH0]  8.13,147.45 0 top
U$154  [GATOR#MICROPHONE0]  37.97,138.05 0 bottom
U$155  [GATOR#MICROPHONE1]  27.94,148.08 0 top
U$156  [3V31]  57.15,130.68 0 top
U$157  [GND0]  46.86,130.68 0 top
U$158  [GND0]  51.69,130.68 0 bottom
U$159  [3V31]  61.72,130.68 0 bottom
U$160  [SCL1]  77.6,130.68 0 top
U$161  [SDA2]  67.31,130.68 0 top
U$162  [PWR0]  51.94,135.64 0 top
U$163  [SDA2]  72.01,130.68 0 bottom
U$164  [SCL1]  82.04,130.68 0 bottom
U$165  [GND0]  51.69,152.78 180 top
U$166  [3V31]  61.72,152.78 180 top
U$167  [SDA2]  72.01,152.65 180 top
U$168  [SCL1]  81.92,152.78 180 top
U$169  [LOW1]  46.74,133.48 0 top
U$170  [VOLUME2]  50.04,140.46 0 top
U$171  [GND0]  46.86,152.78 180 bottom
U$172  [3V31]  57.15,152.78 180 bottom
U$173  [SDA2]  67.18,152.65 180 bottom
U$174  [SCL1]  77.6,152.78 180 bottom
U$175  [HIGH0]  46.74,147.45 0 top
U$176  [GATOR#MICROPHONE0]  76.58,138.05 0 bottom
U$177  [GATOR#MICROPHONE1]  66.55,148.08 0 top

## Library data of the parts
C1 C2 C6 C7 C11 C12 C16 C17 C21 C22 C26 C27 C31 C32 C36 C37 = SparkFun-Capacitors; PROD_ID: CAP-10057
C3 C4 C8 C9 C13 C14 C18 C19 C23 C24 C28 C29 C33 C34 C38 C39 = SparkFun-Capacitors; PROD_ID: CAP-00868
C5 C10 C15 C20 C25 C30 C35 C40 = SparkFun-Capacitors; PROD_ID: CAP-00810
D1 D2 D7 D8 D13 D14 D19 D20 D25 D26 D31 D32 D37 D38 D43 D44 = SparkFun-DiscreteSemi; PROD_ID: DIO-11018
D3 D9 D15 D21 D27 D33 D39 D45 = SparkFun-LED; PROD_ID: DIO-00819
D4-D6 D10-D12 D16-D18 D22-D24 D28-D30 D34-D36 D40-D42 D46-D48 = SparkFun-DiscreteSemi; PROD_ID: DIO-08199
E$3 = SparkFun-Retired
E$5 E$7 E$8 FID1-FID32 FRAME1 FRAME2 LOGO1-LOGO24 U$22 = SparkFun-Aesthetics
H1-H16 = SparkFun-Hardware
J1-J64 TP1-TP8 = SparkFun-Connectors
MIC1-MIC8 = SparkFun-Sensors; PROD_ID: COMP-08856
Q1-Q8 = SparkFun-DiscreteSemi; PROD_ID: TRANS-11308
R1 R24 R47 R70 R93 R116 R139 R162 = SparkFun-Resistors; PROD_ID: RES-08272
R2 R10 R13 R16 R25 R32 R35 R38 R48 R55 R58 R61 R71 R78 R81 R84 R94 R101 R104 R107 R117 R124 R127 R130 R140 R147 R150 R153 R163 R170 R173 R176 = SparkFun-Resistors; PROD_ID: RES-07856
R3 R11 R14 R26 R33 R36 R49 R56 R59 R72 R79 R82 R95 R102 R105 R118 R125 R128 R141 R148 R151 R164 R171 R174 = SparkFun-Resistors; PROD_ID: RES-07828
R4-R6 R9 R17 R21-R23 R27-R30 R42 R44-R46 R50-R53 R65 R67-R69 R73-R76 R88 R90-R92 R96-R99 R111 R113-R115 R119-R122 R134 R136-R138 R142-R145 R157 R159-R161 R165-R168 R180 R182-R184 = SparkFun-Resistors; PROD_ID: RES-00824
R7 R39 R62 R85 R108 R131 R154 R177 = SparkFun-Resistors; PROD_ID: RES-07853
R8 R15 R18 R19 R31 R37 R40 R41 R54 R60 R63 R64 R77 R83 R86 R87 R100 R106 R109 R110 R123 R129 R132 R133 R146 R152 R155 R156 R169 R175 R178 R179 = SparkFun-Resistors; PROD_ID: RES-07863
R12 R34 R57 R80 R103 R126 R149 R172 = SparkFun-Resistors; PROD_ID: RES-07851
R20 R43 R66 R89 R112 R135 R158 R181 = SparkFun-Resistors; PROD_ID: RES-07868
S1-S8 = SparkFun-Switches; PROD_ID: SWCH-10805
U1 U3 U5 U7 U9 U11 U13 U15 = SparkFun-IC-Conversion; PROD_ID: IC-12270
U2 U4 U6 U8 U10 U12 U14 U16 = SparkFun-IC-Amplifiers; PROD_ID: IC-08227
U$1 U$7 U$11 U$18 U$23 U$27 U$34 U$40 U$46 U$49 U$56 U$62 U$68 U$71 U$78 U$84 U$90 U$93 U$100 U$106 U$112 U$115 U$122 U$128 U$134 U$137 U$144 U$150 U$156 U$159 U$166 U$172 = buzzard_labels (3)
U$2 U$3 U$5 U$6 U$8-U$10 U$12 U$13 U$17 U$19 U$20 U$25 U$26 U$28 U$29 U$31-U$33 U$35 U$36 U$39 U$41 U$42 U$47 U$48 U$50 U$51 U$53-U$55 U$57 U$58 U$61 U$63 U$64 U$69 U$70 U$72 U$73 U$75-U$77 U$79 U$80 U$83 U$85 U$86 U$91 U$92 U$94 U$95 U$97-U$99 U$101 U$102 U$105 U$107 U$108 U$113 U$114 U$116 U$117 U$119-U$121 U$123 U$124 U$127 U$129 U$130 U$135 U$136 U$138 U$139 U$141-U$143 U$145 U$146 U$149 U$151 U$152 U$157 U$158 U$160 U$161 U$163-U$165 U$167 U$168 U$171 U$173 U$174 = buzzard_labels (2)
U$4 U$30 U$52 U$74 U$96 U$118 U$140 U$162 = buzzard_labels (5)
U$14 U$24 U$44 U$45 U$66 U$67 U$88 U$89 U$110 U$111 U$132 U$133 U$154 U$155 U$176 U$177 = buzzard_labels (15)
U$15 U$16 U$37 U$38 U$59 U$60 U$81 U$82 U$103 U$104 U$125 U$126 U$147 U$148 U$169 U$170 = buzzard_labels (7)
U$21 U$43 U$65 U$87 U$109 U$131 U$153 U$175 = buzzard_labels (8)

## Nets
3.3V: C3.1 C5.1 D3.A D4.C Q1.2 R1.2 R5.2 R11.2 R22.2 R23.2 U1.8 U2.4
3.3V1: C9.1 C10.1 D9.A D10.C Q2.2 R24.2 R28.2 R33.2 R45.2 R46.2 U3.8 U4.4
3.3V2: C14.1 C15.1 D15.A D16.C Q3.2 R47.2 R51.2 R56.2 R68.2 R69.2 U5.8 U6.4
3.3V3: C19.1 C20.1 D21.A D22.C Q4.2 R70.2 R74.2 R79.2 R91.2 R92.2 U7.8 U8.4
3.3V4: C24.1 C25.1 D27.A D28.C Q5.2 R93.2 R97.2 R102.2 R114.2 R115.2 U9.8 U10.4
3.3V5: C29.1 C30.1 D33.A D34.C Q6.2 R116.2 R120.2 R125.2 R137.2 R138.2 U11.8 U12.4
3.3V6: C34.1 C35.1 D39.A D40.C Q7.2 R139.2 R143.2 R148.2 R160.2 R161.2 U13.8 U14.4
3.3V7: C39.1 C40.1 D45.A D46.C Q8.2 R162.2 R166.2 R171.2 R183.2 R184.2 U15.8 U16.4
AMPENV: R10.2 R13.1 R18.1 U2.14
AMPENV1: R32.2 R35.1 R40.1 U4.14
AMPENV2: R55.2 R58.1 R63.1 U6.14
AMPENV3: R78.2 R81.1 R86.1 U8.14
AMPENV4: R101.2 R104.1 R109.1 U10.14
AMPENV5: R124.2 R127.1 R132.1 U12.14
AMPENV6: R147.2 R150.1 R155.1 U14.14
AMPENV7: R170.2 R173.1 R178.1 U16.14
AUDIO: R19.2 U1.4
AUDIO1: R41.2 U3.4
AUDIO2: R64.2 U5.4
AUDIO3: R87.2 U7.4
AUDIO4: R110.2 U9.4
AUDIO5: R133.2 U11.4
AUDIO6: R156.2 U13.4
AUDIO7: R179.2 U15.4
ENVELOPE: R18.2 U1.6
ENVELOPE1: R40.2 U3.6
ENVELOPE2: R63.2 U5.6
ENVELOPE3: R86.2 U7.6
ENVELOPE4: R109.2 U9.6
ENVELOPE5: R132.2 U11.6
ENVELOPE6: R155.2 U13.6
ENVELOPE7: R178.2 U15.6
GATE: R15.2 U1.7
GATE1: R37.2 U3.7
GATE2: R60.2 U5.7
GATE3: R83.2 U7.7
GATE4: R106.2 U9.7
GATE5: R129.2 U11.7
GATE6: R152.2 U13.7
GATE7: R175.2 U15.7
GND: C1.2 C3.2 C5.2 D5.A D6.A J1.P$2 J5.P$2 MIC1.2 R6.1 R9.1 R12.1 R16.1 R21.1 U1.1 U1.3 U2.5 U2.11
GND1: C6.2 C9.2 C10.2 D11.A D12.A J12.P$2 J13.P$2 MIC2.2 R29.1 R30.1 R34.1 R38.1 R44.1 U3.1 U3.3 U4.5 U4.11
GND2: C11.2 C14.2 C15.2 D17.A D18.A J20.P$2 J21.P$2 MIC3.2 R52.1 R53.1 R57.1 R61.1 R67.1 U5.1 U5.3 U6.5 U6.11
GND3: C16.2 C19.2 C20.2 D23.A D24.A J28.P$2 J29.P$2 MIC4.2 R75.1 R76.1 R80.1 R84.1 R90.1 U7.1 U7.3 U8.5 U8.11
GND4: C21.2 C24.2 C25.2 D29.A D30.A J36.P$2 J37.P$2 MIC5.2 R98.1 R99.1 R103.1 R107.1 R113.1 U9.1 U9.3 U10.5 U10.11
GND5: C26.2 C29.2 C30.2 D35.A D36.A J44.P$2 J45.P$2 MIC6.2 R121.1 R122.1 R126.1 R130.1 R136.1 U11.1 U11.3 U12.5 U12.11
GND6: C31.2 C34.2 C35.2 D41.A D42.A J52.P$2 J53.P$2 MIC7.2 R144.1 R145.1 R149.1 R153.1 R159.1 U13.1 U13.3 U14.5 U14.11
GND7: C36.2 C39.2 C40.2 D47.A D48.A J60.P$2 J61.P$2 MIC8.2 R167.1 R168.1 R172.1 R176.1 R182.1 U15.1 U15.3 U16.5 U16.11
N$: C4.1 R19.1 S1.3 U2.1
N$1: C2.1 MIC1.1 R1.1
N$2: R5.1 R6.2 U2.3
N$3: D3.C R16.2
N$4: R2.2 R3.1 R17.1 R20.1 U2.2
N$5: C2.2 R2.1
N$6: C4.2 R4.1
N$7: D1.A R4.2 R7.1 U2.6
N$8: D2.A U2.7
N$9: D1.C D2.C R7.2 R8.1
N$10: C1.1 R8.2 R9.2 U2.12
N$11: R10.1 U2.13
N$12: TP1.P$1 U1.5
N$13: R17.2 S1.4
N$14: R3.2 S1.2
N$15: R11.1 R12.2 U2.9
N$16: R13.2 R14.1 U2.10
N$17: R14.2 R15.1 U2.8
N$18: R20.2 S1.1
N$19: J4.P$2 J8.P$2 Q1.3
N$20: D4.A Q1.1 R21.2
N$21: C7.1 MIC2.1 R24.1
N$22: R28.1 R29.2 U4.3
N$23: R25.2 R26.1 R42.1 R43.1 U4.2
N$24: C7.2 R25.1
N$25: C8.2 R27.1
N$26: D7.A R27.2 R39.1 U4.6
N$27: D8.A U4.7
N$28: D7.C D8.C R31.1 R39.2
N$29: C6.1 R30.2 R31.2 U4.12
N$30: R32.1 U4.13
N$31: R33.1 R34.2 U4.9
N$32: R35.2 R36.1 U4.10
N$33: R36.2 R37.1 U4.8
N$34: D9.C R38.2
N$35: C8.1 R41.1 S2.3 U4.1
N$36: R42.2 S2.4
N$37: R26.2 S2.2
N$38: R43.2 S2.1
N$39: J11.P$2 J16.P$2 Q2.3
N$40: D10.A Q2.1 R44.2
N$41: TP2.P$1 U3.5
N$42: C12.1 MIC3.1 R47.1
N$43: R51.1 R52.2 U6.3
N$44: R48.2 R49.1 R65.1 R66.1 U6.2
N$45: C12.2 R48.1
N$46: C13.2 R50.1
N$47: D13.A R50.2 R62.1 U6.6
N$48: D14.A U6.7
N$49: D13.C D14.C R54.1 R62.2
N$50: C11.1 R53.2 R54.2 U6.12
N$51: R55.1 U6.13
N$52: R56.1 R57.2 U6.9
N$53: R58.2 R59.1 U6.10
N$54: R59.2 R60.1 U6.8
N$55: D15.C R61.2
N$56: C13.1 R64.1 S3.3 U6.1
N$57: R65.2 S3.4
N$58: R49.2 S3.2
N$59: R66.2 S3.1
N$60: J19.P$2 J24.P$2 Q3.3
N$61: D16.A Q3.1 R67.2
N$62: TP3.P$1 U5.5
N$63: C17.1 MIC4.1 R70.1
N$64: R74.1 R75.2 U8.3
N$65: R71.2 R72.1 R88.1 R89.1 U8.2
N$66: C17.2 R71.1
N$67: C18.2 R73.1
N$68: D19.A R73.2 R85.1 U8.6
N$69: D20.A U8.7
N$70: D19.C D20.C R77.1 R85.2
N$71: C16.1 R76.2 R77.2 U8.12
N$72: R78.1 U8.13
N$73: R79.1 R80.2 U8.9
N$74: R81.2 R82.1 U8.10
N$75: R82.2 R83.1 U8.8
N$76: D21.C R84.2
N$77: C18.1 R87.1 S4.3 U8.1
N$78: R88.2 S4.4
N$79: R72.2 S4.2
N$80: R89.2 S4.1
N$81: J27.P$2 J32.P$2 Q4.3
N$82: D22.A Q4.1 R90.2
N$83: TP4.P$1 U7.5
N$84: C22.1 MIC5.1 R93.1
N$85: R97.1 R98.2 U10.3
N$86: R94.2 R95.1 R111.1 R112.1 U10.2
N$87: C22.2 R94.1
N$88: C23.2 R96.1
N$89: D25.A R96.2 R108.1 U10.6
N$90: D26.A U10.7
N$91: D25.C D26.C R100.1 R108.2
N$92: C21.1 R99.2 R100.2 U10.12
N$93: R101.1 U10.13
N$94: R102.1 R103.2 U10.9
N$95: R104.2 R105.1 U10.10
N$96: R105.2 R106.1 U10.8
N$97: D27.C R107.2
N$98: C23.1 R110.1 S5.3 U10.1
N$99: R111.2 S5.4
N$100: R95.2 S5.2
N$101: R112.2 S5.1
N$102: J35.P$2 J40.P$2 Q5.3
N$103: D28.A Q5.1 R113.2
N$104: TP5.P$1 U9.5
N$105: C27.1 MIC6.1 R116.1
N$106: R120.1 R121.2 U12.3
N$107: R117.2 R118.1 R134.1 R135.1 U12.2
N$108: C27.2 R117.1
N$109: C28.2 R119.1
N$110: D31.A R119.2 R131.1 U12.6
N$111: D32.A U12.7
N$112: D31.C D32.C R123.1 R131.2
N$113: C26.1 R122.2 R123.2 U12.12
N$114: R124.1 U12.13
N$115: R125.1 R126.2 U12.9
N$116: R127.2 R128.1 U12.10
N$117: R128.2 R129.1 U12.8
N$118: D33.C R130.2
N$119: C28.1 R133.1 S6.3 U12.1
N$120: R134.2 S6.4
N$121: R118.2 S6.2
N$122: R135.2 S6.1
N$123: J43.P$2 J48.P$2 Q6.3
N$124: D34.A Q6.1 R136.2
N$125: TP6.P$1 U11.5
N$126: C32.1 MIC7.1 R139.1
N$127: R143.1 R144.2 U14.3
N$128: R140.2 R141.1 R157.1 R158.1 U14.2
N$129: C32.2 R140.1
N$130: C33.2 R142.1
N$131: D37.A R142.2 R154.1 U14.6
N$132: D38.A U14.7
N$133: D37.C D38.C R146.1 R154.2
N$134: C31.1 R145.2 R146.2 U14.12
N$135: R147.1 U14.13
N$136: R148.1 R149.2 U14.9
N$137: R150.2 R151.1 U14.10
N$138: R151.2 R152.1 U14.8
N$139: D39.C R153.2
N$140: C33.1 R156.1 S7.3 U14.1
N$141: R157.2 S7.4
N$142: R141.2 S7.2
N$143: R158.2 S7.1
N$144: J51.P$2 J56.P$2 Q7.3
N$145: D40.A Q7.1 R159.2
N$146: TP7.P$1 U13.5
N$147: C37.1 MIC8.1 R162.1
N$148: R166.1 R167.2 U16.3
N$149: R163.2 R164.1 R180.1 R181.1 U16.2
N$150: C37.2 R163.1
N$151: C38.2 R165.1
N$152: D43.A R165.2 R177.1 U16.6
N$153: D44.A U16.7
N$154: D43.C D44.C R169.1 R177.2
N$155: C36.1 R168.2 R169.2 U16.12
N$156: R170.1 U16.13
N$157: R171.1 R172.2 U16.9
N$158: R173.2 R174.1 U16.10
N$159: R174.2 R175.1 U16.8
N$160: D45.C R176.2
N$161: C38.1 R179.1 S8.3 U16.1
N$162: R180.2 S8.4
N$163: R164.2 S8.2
N$164: R181.2 S8.1
N$165: J59.P$2 J64.P$2 Q8.3
N$166: D46.A Q8.1 R182.2
N$167: TP8.P$1 U15.5
SCL: D6.C J2.P$2 J7.P$2 R23.1 U1.10
SCL1: D12.C J9.P$2 J15.P$2 R46.1 U3.10
SCL2: D18.C J17.P$2 J23.P$2 R69.1 U5.10
SCL3: D24.C J25.P$2 J31.P$2 R92.1 U7.10
SCL4: D30.C J33.P$2 J39.P$2 R115.1 U9.10
SCL5: D36.C J41.P$2 J47.P$2 R138.1 U11.10
SCL6: D42.C J49.P$2 J55.P$2 R161.1 U13.10
SCL7: D48.C J57.P$2 J63.P$2 R184.1 U15.10
SDA: D5.C J3.P$2 J6.P$2 R22.1 U1.9
SDA1: D11.C J10.P$2 J14.P$2 R45.1 U3.9
SDA2: D17.C J18.P$2 J22.P$2 R68.1 U5.9
SDA3: D23.C J26.P$2 J30.P$2 R91.1 U7.9
SDA4: D29.C J34.P$2 J38.P$2 R114.1 U9.9
SDA5: D35.C J42.P$2 J46.P$2 R137.1 U11.9
SDA6: D41.C J50.P$2 J54.P$2 R160.1 U13.9
SDA7: D47.C J58.P$2 J62.P$2 R183.1 U15.9